# Altium PCB 175-00024_rev1, Backplane, Instrument Crate.PcbDoc (part 3 of 4)
Units mil, origin at the board's own origin, x right, y up, seen from the top; angles counter-clockwise.
Board outline 8400 x 10183.07 mil, 8 copper layers (Top Layer (*.GTL), Mid-Layer 1 (*.G1), +24V (*.GP1), RTN (*.GP2), +3.3V (*.GP3), +12V (*.GP4), Signal GND (*.GP5), Bottom Layer (*.GBL)); 192 components, 150 nets, 1439 pads, 415 vias.
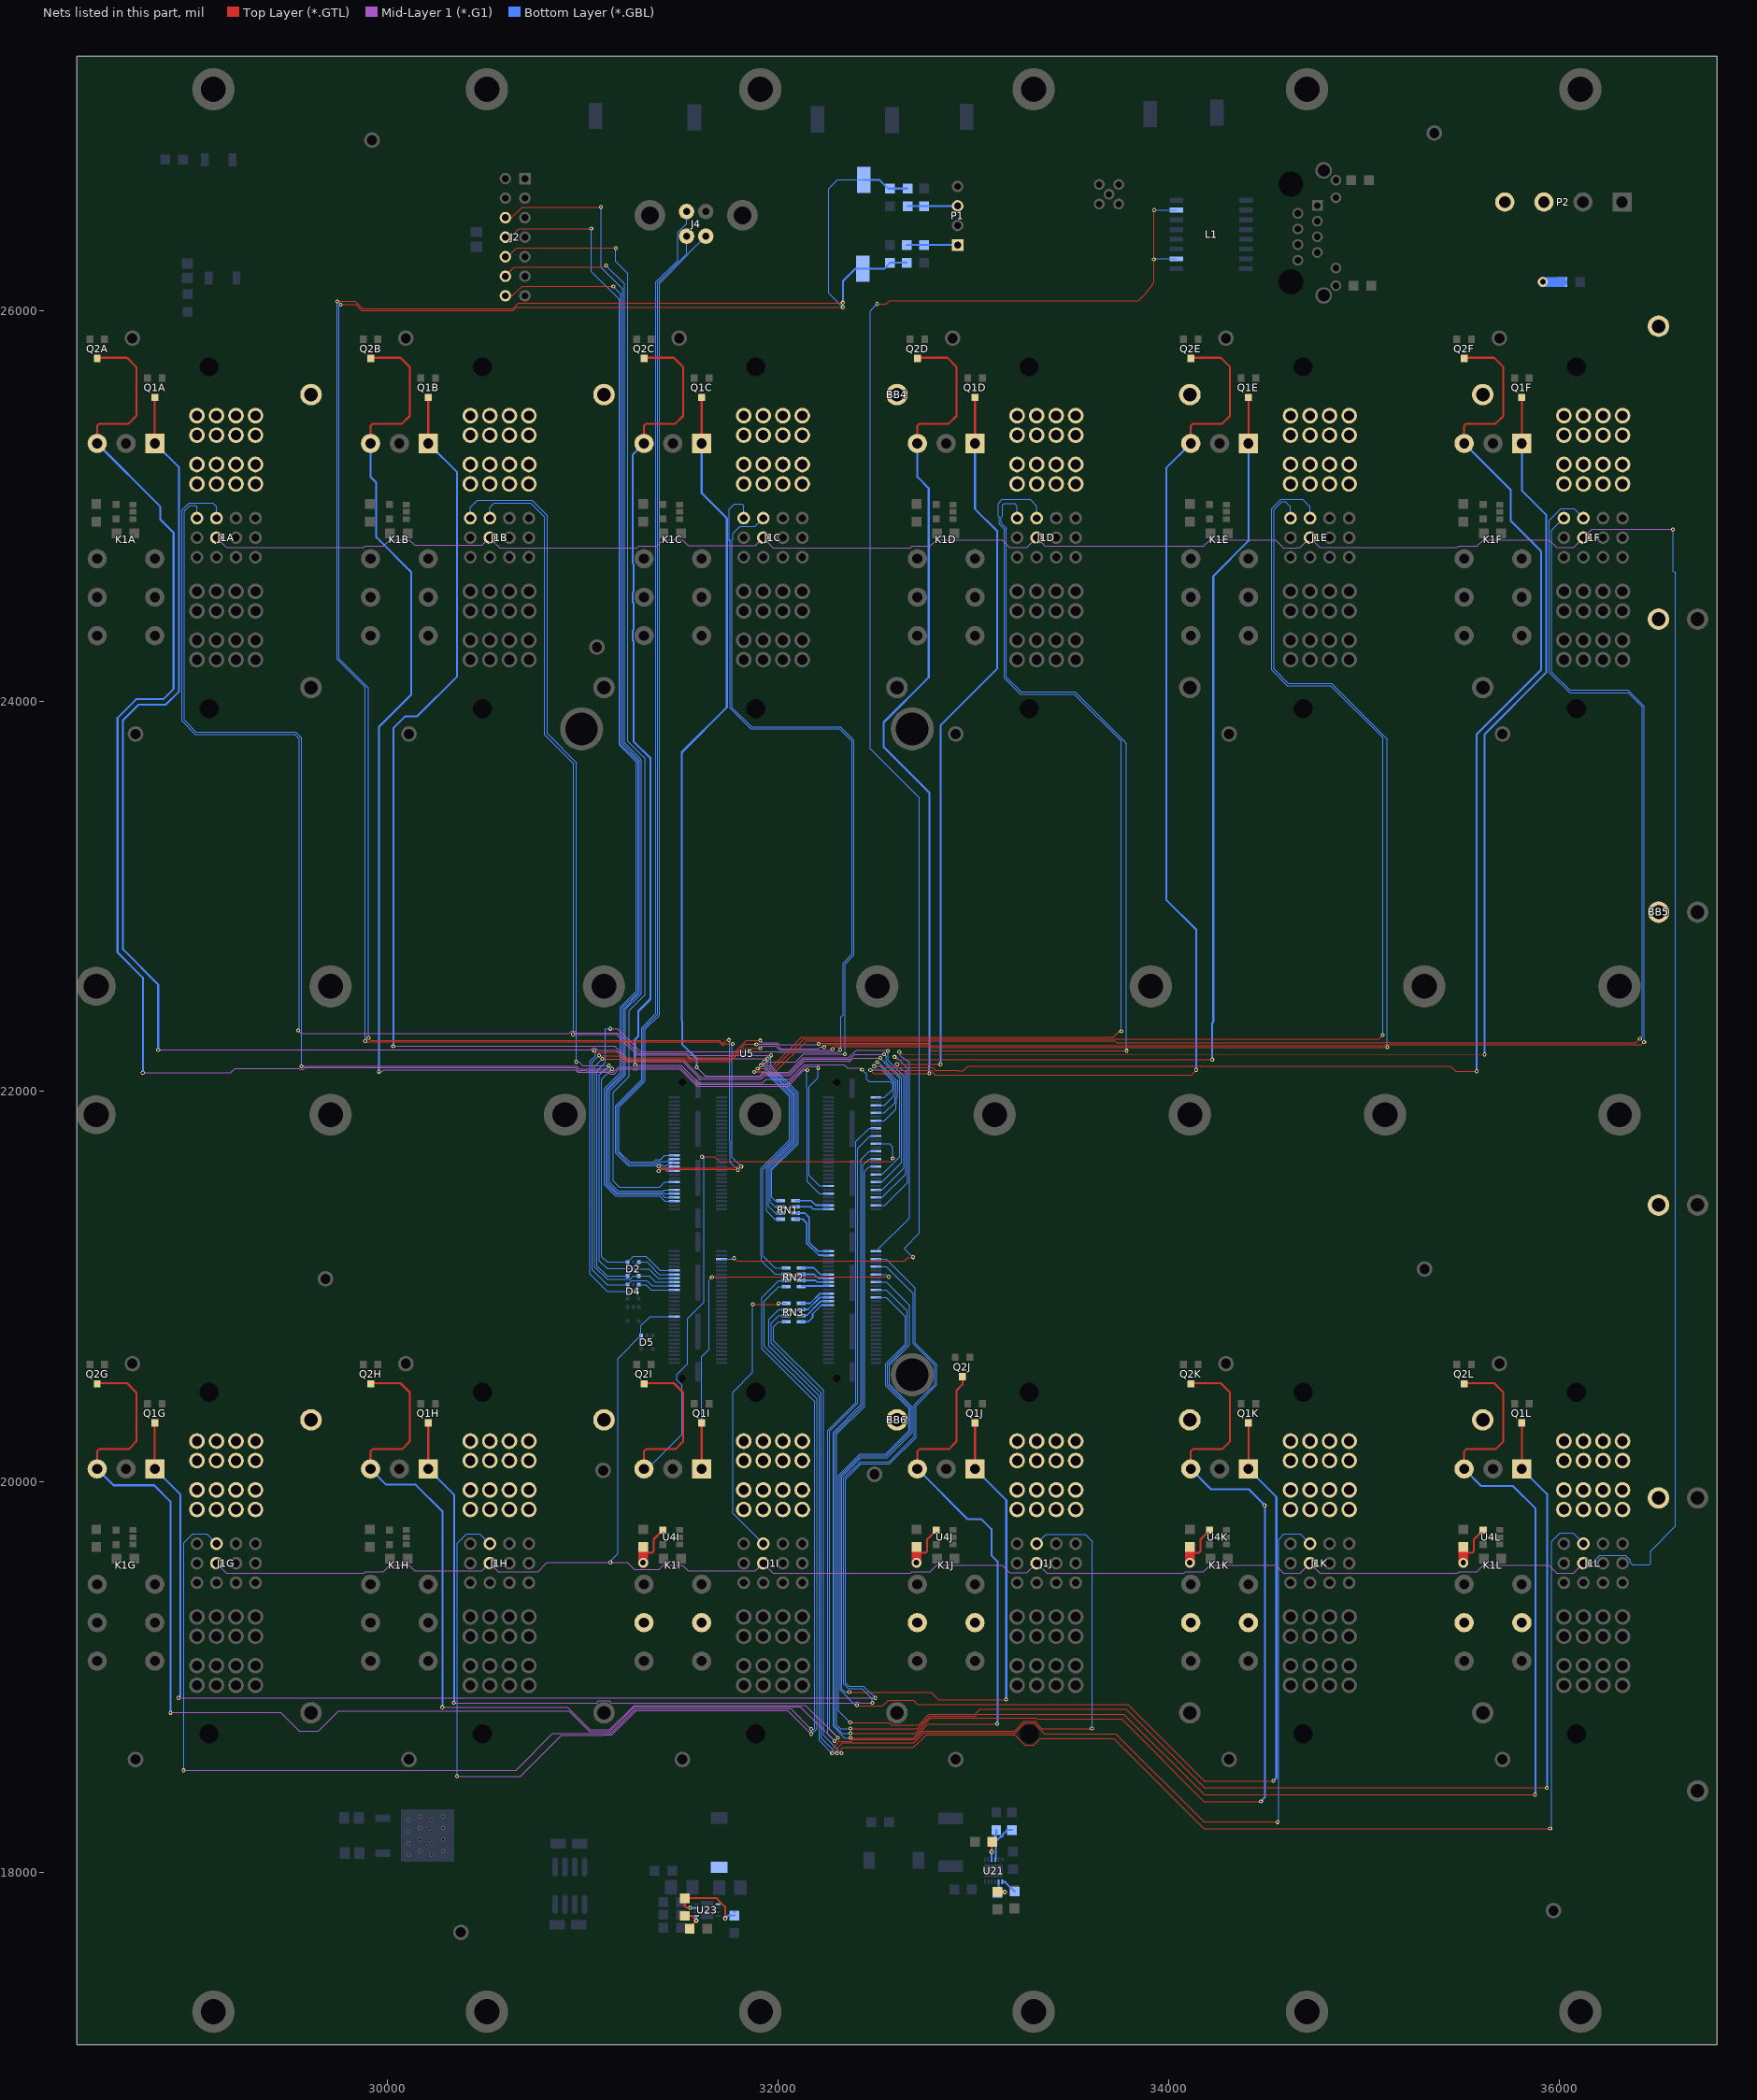
[diagram p9: the nets of this part, all layers, seen from the top]

## Via types
v1: diameter 20, hole 10, Top Layer (*.GTL) to Bottom Layer (*.GBL), 337 vias
v2: diameter 24, hole 10, Top Layer (*.GTL) to Bottom Layer (*.GBL), 48 vias
v3: diameter 50, hole 28, Top Layer (*.GTL) to Bottom Layer (*.GBL), 26 vias
v4: diameter 25.98, hole 12.99, Top Layer (*.GTL) to Bottom Layer (*.GBL), tented top, 4 vias

## Nets (pads, with @x,y where several pads share a name; then routed paths per layer and width w, separated by ;. In a path a pad name is that pad's centre, name@x,y a point inside that pad or via, vN(x,y) a via of type N, cw(c..) or ccw(c..) an arc to the next point about the centre after c; other vN are vias at no path point) (continued)
NetK1I_11: K1I.11 R4I.2 U4I.4 | length 235.6
  Top Layer (*.GTL) w10: 31309.99,19637.82 31354.99,19637.82 31364.99,19647.82 31364.99,19707.82 U4I.4@31411.99,19754.82
  Top Layer (*.GTL) w50: v3(31309.99,19587.82) 31309.99,19637.82
NetK1J_11: K1J.11 R4J.2 U4J.4 | length 265.6
  Top Layer (*.GTL) w10: 32709.99,19637.82 32754.99,19637.82 32764.99,19647.82 32764.99,19707.82 U4J.4@32811.99,19754.82
  Top Layer (*.GTL) w50: v3(32709.99,19587.82) 32709.99,19637.82 R4J.2@32709.99,19667.82
NetK1K_11: K1K.11 R4K.2 U4K.4 | length 265.6
  Top Layer (*.GTL) w10: 34109.99,19637.82 34154.99,19637.82 34164.99,19647.82 34164.99,19707.82 U4K.4@34211.99,19754.82
  Top Layer (*.GTL) w50: v3(34109.99,19587.82) 34109.99,19637.82 R4K.2@34109.99,19667.82
NetK1L_11: K1L.11 R4L.2 U4L.4 | length 265.6
  Top Layer (*.GTL) w10: 35509.99,19637.82 35554.99,19637.82 35564.99,19647.82 35564.99,19707.82 U4L.4@35611.99,19754.82
  Top Layer (*.GTL) w50: v3(35509.99,19587.82) 35509.99,19637.82 R4L.2@35509.99,19667.82
NetL3_1: L3.1 U23.1
NetP1_1: P1.1 R8.1 R9.2 | length 261.4
  Bottom Layer (*.GBL) w10: R9.2@32660,26334.08 32661,26335.08 P1.1@32921,26335.08
NetP1_3: P1.3 R10.1 R11.2 | length 256.4
  Bottom Layer (*.GBL) w10: R11.2@32665,26534.08 32666,26535.08 P1.3@32921,26535.08
NetR29_2: R29.2 R30.2 U21.9 | length 212.9
  Top Layer (*.GTL) w10: v2(33095.8,18107.34) 33095.8,18155.34 R29.2@33098.8,18158.34
  Bottom Layer (*.GBL) w10: U21.9@33095.65,18067.52 v2@33095.65,18107.19 ; v2(33095.8,18107.34) v2@33095.65,18107.19 ; R30.2@33118.8,18218.34 33118.8,18191.34 33095.65,18168.19 v2@33095.65,18107.19
NetR31_2: R31.2 U21.10 | length 204.2
  Bottom Layer (*.GBL) w10: U21.10@33113.37,18067.52 33116.8,18070.95 33116.8,18160.34 33140.8,18184.34 33147.53,18184.34 33152.8,18189.62 33152.8,18196.34 33174.8,18218.34 R31.2@33198.8,18218.34
NetR32_1: R32.1 R34.2 U21.2 | length 129.6
  Top Layer (*.GTL) w10: R34.2@33123.8,17903.34 33125.8,17901.34 v2(33162.8,17901.34)
  Bottom Layer (*.GBL) w10: U21.2@33131.08,17953.34 33131.08,17905.63 33126.8,17901.34 v2(33162.8,17901.34)
NetR33_2: R33.2 U21.1 | length 85.7
  Bottom Layer (*.GBL) w10: U21.1@33148.8,17953.34 33163.8,17953.34 R33.2@33213.8,17903.34
NetR35_1: R35.1 R37.2 U23.5 | length 148.2
  Top Layer (*.GTL) w10: R37.2@31523.98,17779 31559.98,17779 v2(31582.98,17756) 31548.98,17722 R35.1@31548.98,17714
  Bottom Layer (*.GBL) w10: v2(31582.98,17756) 31583.37,17756.39 U23.5@31583.37,17779.47
NetR37_1: R37.1 R40.2 U23.7 | length 440.7
  Top Layer (*.GTL) w10: v1(31551,17821) 31534,17821 31523.98,17831.02 R37.1@31523.98,17869 31686.98,17869 31729.98,17826 v2(31729.98,17766)
  Bottom Layer (*.GBL) w10: v1(31551,17821) 31553.16,17818.84 U23.7@31583.37,17818.84 ; v2(31729.98,17766) 31744.98,17781 R40.2@31777.98,17781 ; R40.2@31778.82,17799.15 R40.2@31778.98,17799
NetRN1_2: RN1.2 U5.B63 | length 306.1
  Bottom Layer (*.GBL) w8: RN1.2@32090.71,21346.6 32091.71,21347.6 32127,21347.6 32149,21325.6 32149,21222.49 32209.15,21162.35 U5.B63@32259.28,21162.35
NetRN1_4: RN1.4 U5.B61 | length 324.8
  Bottom Layer (*.GBL) w8: RN1.4@32090.71,21378.09 32138.5,21378.09 32161,21355.6 32161,21227.46 32206.43,21182.03 U5.B61@32259.28,21182.03
NetRN1_6: RN1.6 U5.B59 | length 173.1
  Bottom Layer (*.GBL) w8: RN1.6@32090.71,21409.59 32170.01,21409.59 32181.03,21398.57 U5.B59@32259.28,21398.57
NetRN1_8: RN1.8 U5.B57 | length 178
  Bottom Layer (*.GBL) w8: RN1.8@32090.71,21441.09 32171.51,21441.09 32194.35,21418.25 U5.B57@32259.28,21418.25
NetRN2_2: RN2.2 U5.B79 | length 139.9
  Bottom Layer (*.GBL) w8: RN2.2@32120.71,21001.6 32123.98,21004.87 U5.B79@32259.28,21004.87
NetRN2_4: RN2.4 U5.B77 | length 142.1
  Bottom Layer (*.GBL) w8: RN2.4@32120.71,21033.09 32192.5,21033.09 32201.05,21024.55 U5.B77@32259.28,21024.55
NetRN2_6: RN2.6 U5.B75 | length 147
  Bottom Layer (*.GBL) w8: RN2.6@32120.71,21064.59 32187.01,21064.59 32207.36,21044.24 U5.B75@32259.28,21044.24
NetRN2_8: RN2.8 U5.B73 | length 153.1
  Bottom Layer (*.GBL) w8: RN2.8@32120.71,21096.09 32122.22,21097.6 32185,21097.6 32218.68,21063.92 U5.B73@32259.28,21063.92
NetRN3_2: RN3.2 U5.B89 | length 184.3
  Bottom Layer (*.GBL) w8: RN3.2@32120.71,20821.6 32157,20821.6 32178,20842.6 32178,20860.6 32223.84,20906.44 U5.B89@32259.28,20906.44
NetRN3_4: RN3.4 U5.B87 | length 168.8
  Bottom Layer (*.GBL) w8: RN3.4@32120.71,20853.09 32147.5,20853.09 32220.53,20926.13 U5.B87@32259.28,20926.13
NetRN3_6: RN3.6 U5.B85 | length 163.9
  Bottom Layer (*.GBL) w8: RN3.6@32120.71,20884.59 32153.99,20884.59 32215.21,20945.81 U5.B85@32259.28,20945.81
NetRN3_8: RN3.8 U5.B83 | length 159
  Bottom Layer (*.GBL) w8: RN3.8@32120.71,20916.09 32166.69,20916.09 32216.1,20965.5 U5.B83@32259.28,20965.5
PWR_OFF1: K1A.1 Q1A.3 U5.B42 | length 8220.1
  Top Layer (*.GTL) w5: K1A.1@28810,25319 K1A.1@28827.92,25301.08
  Top Layer (*.GTL) w10: K1A.1@28810,25319 Q1A.3@28810,25557.74
  Mid-Layer 1 (*.G1) w5: v1@28827,22214.91 31043.5,22214.91 31053.17,22224.58 31066.83,22224.58 31076.5,22214.91 31076.5,22212.08 31172.46,22212.08 31230.46,22154.08 31511.46,22154.08 31602.46,22063.08 31913.54,22063.08 31932.54,22082.08 32063.21,22082.08 32137.21,22156.08 32354.54,22156.08 32356.08,22154.54 32368.92,22154.54 32386.46,22172.08 v1(32525,22172.08)
  Bottom Layer (*.GBL) w5: U5.B42@32502.59,21575.73 32534,21575.73 32625,21666.73 32625,22067.35 32546,22146.35 32546,22151.08 v1(32525,22172.08)
  Bottom Layer (*.GBL) w10: K1A.1@28810,25319 28934,25195 28934,24050.08 28865,23981.08 28726,23981.08 28647,23902.08 28647,22728.08 28827,22548.08 v1(28827,22213.08)
PWR_OFF2: K1B.1 Q1B.3 U5.B46 | length 6955.1
  Top Layer (*.GTL) w10: K1B.1@30210,25319 Q1B.3@30210,25557.74
  Mid-Layer 1 (*.G1) w5: v1@30031,22233.08 31048.94,22233.08 31049.44,22233.58 31070.56,22233.58 31071.06,22233.08 31164.18,22233.08 31234.18,22163.08 31515.18,22163.08 31606.18,22072.08 31909.82,22072.08 31928.82,22091.08 32059.48,22091.08 32133.48,22165.08 32358.27,22165.08 32359.81,22163.54 32365.19,22163.54 32392.73,22191.08 v1(32545,22191.08)
  Bottom Layer (*.GBL) w5: U5.B46@32502.59,21536.36 32534,21536.36 32635,21637.36 32635,22070.08 32561.58,22143.49 32555,22150.08 32555,22181.08 v1(32545,22191.08)
  Bottom Layer (*.GBL) w10: v1(30031,22232.08) 30031,23860.08 30093,23922.08 30154,23922.08 30358,24126.08 30358,25171 K1B.1@30210,25319
PWR_OFF3: K1C.1 Q1C.3 U5.B50 | length 5491.3
  Top Layer (*.GTL) w10: K1C.1@31610,25319 Q1C.3@31610,25557.74
  Mid-Layer 1 (*.G1) w5: v1(31585,22124.08) 31627,22082.08 ; 31627,22081.08 31906.09,22081.08 31925.09,22100.08 32055.75,22100.08 32129.75,22174.08 32362,22174.08 32362.5,22173.58 32401,22212.08 32560,22212.08 v1(32564,22208.08)
  Mid-Layer 1 (*.G1) w10: v1@31585,22122.17 v1(31585,22124.08)
  Bottom Layer (*.GBL) w5: U5.B50@32502.59,21496.99 32534,21496.99 32645,21607.99 32645,22076.99 32564,22157.99 v1(32564,22208.08)
  Bottom Layer (*.GBL) w10: v1(31585,22124.08) 31585,22168.08 31510,22243.08 31510,22362.08 31508,22364.08 31508,23737.08 31739,23968.08 31739,24936.08 31610,25065.08 K1C.1@31610,25319
PWR_OFF4: K1D.1 Q1D.3 U5.B54 | length 4596.5
  Top Layer (*.GTL) w5: v1@32610,22140.76 v1@32833,22140.76
  Top Layer (*.GTL) w10: K1D.1@33010,25319 Q1D.3@33010,25557.74
  Bottom Layer (*.GBL) w5: U5.B54@32502.59,21457.62 32534,21457.62 32655,21578.62 32655,22100.93 32614.14,22124.58 v1(32610,22140.08)
  Bottom Layer (*.GBL) w10: v1(32833,22140.08) 32833,23875.08 33124,24166.08 33124,24869.08 33010,24983.08 K1D.1@33010,25319
PWR_OFF5: K1E.1 Q1E.3 U5.B58 | length 5989.5
  Top Layer (*.GTL) w5: v1(32598,22178) 32611.27,22164.73 v1@34225,22164.73
  Top Layer (*.GTL) w10: K1E.1@34410,25319 Q1E.3@34410,25557.74
  Bottom Layer (*.GBL) w5: U5.B58@32502.59,21418.25 32549.17,21418.25 32665,21534.08 32665,22119 32611.21,22172.79 32603.21,22172.79 v1(32598,22178)
  Bottom Layer (*.GBL) w10: v1(34225,22164.08) 34225,22350.95 34230,22355.95 34230,24639.08 34410,24819.08 K1E.1@34410,25319
PWR_OFF6: K1F.1 Q1F.3 U5.B62 | length 7672.8
  Top Layer (*.GTL) w5: v1(32622,22204) 32637,22189 32638,22189 v1@35619,22188.7
  Top Layer (*.GTL) w10: K1F.1@35810,25319 Q1F.3@35810,25557.74
  Bottom Layer (*.GBL) w5: U5.B62@32502.59,21182.03 32674,21353.44 32674,22149.81 32625.37,22184.27 v1(32622,22204)
  Bottom Layer (*.GBL) w10: v1(35619,22190.08) 35619,23830.08 35936,24147.08 35936,24952.08 35810,25078.08 K1F.1@35810,25319
PWR_OFF7: K1G.1 Q1G.3 U5.B66 | length 7830.7
  Top Layer (*.GTL) w10: K1G.1@28809.99,20067.82 Q1G.3@28809.99,20306.56
  Mid-Layer 1 (*.G1) w5: v1(28931,18895.08) v1(32499,18895.08)
  Bottom Layer (*.GBL) w5: v1(32499,18895.08) 32439,18955.08 32364,18955.08 32347,18972.08 32347,20015.08 32426,20094.08 32572.71,20094.08 32707.5,20228.87 32707.5,20391.41 32814.15,20498.06 32814.15,20602.22 32704,20712.37 32704,20993.66 32555,21142.66 U5.B66@32502.59,21142.66
  Bottom Layer (*.GBL) w10: K1G.1@28809.99,20067.82 28940,19937.81 28940,18904.08 v1(28931,18895.08)
PWR_OFF8: K1H.1 Q1H.3 U5.B70 | length 6415.1
  Top Layer (*.GTL) w10: K1H.1@30209.99,20067.82 Q1H.3@30209.99,20306.56
  Mid-Layer 1 (*.G1) w5: v1(30341,18870.08) 31074.1,18870.08 31084.53,18880.5 31135.47,18880.5 31145.9,18870.08 32394.67,18870.08 32399.17,18874.58 32412.83,18874.58 32417.33,18870.08 v1(32484,18870.08)
  Bottom Layer (*.GBL) w5: v1(32484,18870.08) 32484,18885.24 32482.5,18886.74 32482.5,18889.58 32430,18942.08 32362,18942.08 32338,18966.08 32338,20018.81 32423.27,20104.08 32568.57,20104.08 32698.5,20234.01 32698.5,20395.14 32805.15,20501.79 32805.15,20598.5 32694,20709.65 32694,20964.29 32555,21103.29 U5.B70@32502.59,21103.29
  Bottom Layer (*.GBL) w10: K1H.1@30209.99,20067.82 30342,19935.81 30342,18871.08 v1(30341,18870.08)
PWR_OFF9: K1I.1 Q1I.3 U5.B74 | length 2218.9
  Top Layer (*.GTL) w5: v1(31663,21050.08) 32567,21050.08 v1(32568,21051.08)
  Top Layer (*.GTL) w10: K1I.1@31609.99,20067.82 Q1I.3@31609.99,20306.56
  Bottom Layer (*.GBL) w5: K1I.1@31609.99,20067.82 31609.99,20642.39 31647.5,20679.91 31647.5,21034.58 v1(31663,21050.08) ; U5.B74@32502.59,21063.92 32555,21063.92 ; 32555.16,21063.92 v1(32568,21051.08)
PWR_OFF10: K1J.1 Q1J.3 U5.B78 | length 4853.6
  Top Layer (*.GTL) w5: v1(32366,18925.08) 32784.09,18925.08 32822.36,18886.81 v1@33169,18886.81
  Top Layer (*.GTL) w10: K1J.1@33009.99,20067.82 Q1J.3@33009.99,20306.56
  Bottom Layer (*.GBL) w5: v1(32366,18925.08) 32364,18927.08 32342,18927.08 32329,18940.08 32329,20027.08 32426,20124.08 32560.28,20124.08 32689.5,20253.29 32689.5,20383.97 32571.68,20501.79 32571.68,20598.5 32674,20700.82 32674,20905.55 32555,21024.55 U5.B78@32502.59,21024.55
  Bottom Layer (*.GBL) w10: K1J.1@33009.99,20067.82 33170,19907.81 33170,18888.08 v1(33169,18887.08)
PWR_OFF11: K1K.1 Q1K.3 U5.B82 | length 6800.8
  Top Layer (*.GTL) w5: v1(32406,18858.08) 32410.5,18853.58 32536.5,18853.58 32566,18883.08 32695,18883.08 32716.27,18861.81 33792.54,18861.81 34184.26,18470.08 v1@34538,18470.08
  Top Layer (*.GTL) w10: K1K.1@34409.99,20067.82 Q1K.3@34409.99,20306.56
  Bottom Layer (*.GBL) w5: v1(32406,18858.08) 32398.27,18858.08 32320,18936.35 32320,20030.81 32423.27,20134.08 32556.14,20134.08 32680.5,20258.44 32680.5,20380.24 32562.68,20498.06 32562.68,20602.22 32664,20703.55 32664,20876.18 32555,20985.18 U5.B82@32502.59,20985.18
  Bottom Layer (*.GBL) w10: K1K.1@34409.99,20067.82 34553,19924.81 34553,18486.08 v1(34538,18471.08)
PWR_OFF12: K1L.1 Q1L.3 U5.B86 | length 8309.1
  Top Layer (*.GTL) w5: v1(32371,18769.08) 32572.95,18769.08 32584.53,18757.5 32722.78,18757.5 32775.92,18810.64 33009.38,18810.64 33035.54,18836.81 33782.18,18836.81 34183.91,18435.08 v1@35939,18435.08
  Top Layer (*.GTL) w10: K1L.1@35809.99,20067.82 Q1L.3@35809.99,20306.56
  Bottom Layer (*.GBL) w5: v1(32371,18769.08) 32311,18829.08 32311,20034.53 32420.54,20144.08 32552,20144.08 32671.5,20263.58 32671.5,20376.51 32553.68,20494.33 32553.68,20605.95 32654,20706.27 32654,20846.81 32555,20945.81 U5.B86@32502.59,20945.81
  Bottom Layer (*.GBL) w10: K1L.1@35809.99,20067.82 35939,19938.81 35939,18436.08 v1(35938,18435.08)
PWR_ON1: K1A.2 Q2A.3 U5.B47 | length 8690.5
  Top Layer (*.GTL) w10: K1A.2@28514.72,25319 28514.72,25409.37 28525.5,25420.14 28675.5,25420.14 28715.5,25460.14 28715.5,25710.14 28667.9,25757.74 Q2A.3@28515,25757.74
  Mid-Layer 1 (*.G1) w5: v1@28748,22096.6 29198.29,22096.6 29220.77,22119.08 29547.67,22119.08 29554.17,22112.58 29567.83,22112.58 29577.33,22122.08 30964.39,22122.08 30979.39,22107.08 30994.4,22107.08 30995.4,22108.08 31018.6,22108.08 31019.6,22107.08 31137.67,22107.08 31145.17,22099.58 31158.83,22099.58 31184.33,22125.08 31257.67,22125.08 31263.17,22119.58 31276.83,22119.58 31282.33,22125.08 31499.73,22125.08 31588.73,22036.08 32048,22036.08 32141,22129.08 32199,22129.08 v1(32207,22121.08)
  Bottom Layer (*.GBL) w5: v1(32207,22121.08) 32207,22070.08 32161,22024.08 32161,21569.68 32214,21516.68 U5.B47@32259.28,21516.68
  Bottom Layer (*.GBL) w10: K1A.2@28514.72,25319 28837,24996.72 28837,24931.08 28906,24862.08 28906,24061.68 28853.4,24009.08 28714.4,24009.08 28619,23913.68 28619,22713.08 28749,22583.08 28749,22098.08 v1(28748,22097.08)
PWR_ON2: K1B.2 Q2B.3 U5.B51 | length 7149.7
  Top Layer (*.GTL) w10: K1B.2@29914.72,25319 29914.72,25409.37 29925.5,25420.14 30075.5,25420.14 30115.5,25460.14 30115.5,25710.14 30067.9,25757.74 Q2B.3@29915,25757.74
  Mid-Layer 1 (*.G1) w5: v1(29958,22102.08) 29972.48,22102.08 29980.48,22110.08 30963.66,22110.08 30975.66,22098.08 30998.13,22098.08 30999.13,22099.08 31014.87,22099.08 31015.87,22098.08 31133.94,22098.08 31141.44,22090.58 31162.56,22090.58 31187.06,22115.08 31254.94,22115.08 31259.44,22110.58 31280.56,22110.58 31285.06,22115.08 31497,22115.08 31585,22027.08 32051.73,22027.08 32134.73,22110.08 v1(32151,22110.08)
  Bottom Layer (*.GBL) w5: v1(32151,22110.08) 32149,22108.08 32149,22021.08 32151,22019.08 32151,21540.31 32214,21477.31 U5.B51@32259.28,21477.31
  Bottom Layer (*.GBL) w10: K1B.2@29914.72,25319 29914.72,25147.36 29944,25118.08 29944,24839.08 30123,24660.08 30123,24032.08 29958,23867.08 v1(29958,22102.08)
PWR_ON3: K1C.2 Q2C.3 U5.B2 | length 5648.6
  Top Layer (*.GTL) w10: K1C.2@31314.72,25319 31314.72,25409.37 31325.5,25420.14 31475.5,25420.14 31515.5,25460.14 31515.5,25710.14 31467.9,25757.74 Q2C.3@31315,25757.74
  Mid-Layer 1 (*.G1) w5: v1(31270,22136.08) 31504,22136.08 31595,22045.08 31921,22045.08 31940,22064.08 32063.27,22064.08 32137.27,22138.08 32144.67,22138.08 32339.73,22138.08 32356.85,22120.96 32422.12,22120.96 v1(32431,22112.08)
  Bottom Layer (*.GBL) w5: v1(32431,22112.08) 32454,22089.08 32454,22064.34 32466.38,22051.96 32576.12,22051.96 32588,22040.08 32588,22011.43 32546,21969.43 U5.B2@32502.59,21969.43
  Bottom Layer (*.GBL) w10: v1@31268,22136.08 31268,22265.55 31286,22283.55 31286,22411.53 31348,22473.53 31348,23707.25 31261,23794.25 31261,24306.15 31256.51,24310.64 31256.51,24358.86 31261,24363.35 31261,24503 31256.51,24507.49 31256.51,24555.71 31261,24560.2 31261,24699.85 31256.51,24704.34 31256.51,25260.79 K1C.2@31314.72,25319
PWR_ON4: K1D.2 Q2D.3 U5.B6 | length 4862.2
  Top Layer (*.GTL) w5: v1(32474,22110.08) 32491,22093.08 v1(32777,22093.08)
  Top Layer (*.GTL) w10: K1D.2@32714.72,25319 32714.72,25409.37 32725.5,25420.14 32875.5,25420.14 32915.5,25460.14 32915.5,25710.14 32867.9,25757.74 Q2D.3@32715,25757.74
  Bottom Layer (*.GBL) w5: v1(32474,22110.08) 32530.73,22110.08 32597,22043.81 32597,22007.71 32594,22004.71 32594,21978.06 32546,21930.06 U5.B6@32502.59,21930.06
  Bottom Layer (*.GBL) w10: K1D.2@32714.72,25319 32714.72,25147.36 32772.94,25089.15 32772.94,24121.02 32542,23890.08 32542,23765.17 32776,23531.17 32776,22130.08 32775,22129.08 v1@32775,22095.08
PWR_ON5: K1E.2 Q2E.3 U5.B10 | length 6157.2
  Top Layer (*.GTL) w5: v1(32493,22130.08) 32514,22109.08 32769.67,22109.08 32770.17,22109.58 32783.83,22109.58 32807.51,22085.9 34117.82,22085.9 v1(34143,22111.08)
  Top Layer (*.GTL) w10: K1E.2@34114.72,25319 34114.72,25409.37 34125.5,25420.14 34275.5,25420.14 34315.5,25460.14 34315.5,25710.14 34267.9,25757.74 Q2E.3@34115,25757.74
  Bottom Layer (*.GBL) w5: v1(32493,22130.08) 32523.46,22130.08 32606,22047.53 32606,22003.98 32603,22000.98 32603,21974.33 32600,21971.33 32600,21944.69 32546,21890.69 U5.B10@32502.59,21890.69
  Bottom Layer (*.GBL) w10: K1E.2@34114.72,25319 33989,25193.28 33989,22983.08 34142,22830.08 v1@34142,22111.08
PWR_ON6: K1F.2 Q2F.3 U5.B14 | length 7825
  Top Layer (*.GTL) w5: v1(32509,22151.08) 32536,22124.08 32602.67,22124.08 32603.17,22123.58 32793.5,22123.58 32807.5,22109.58 32923.5,22109.58 32926.5,22106.58 32949.83,22106.58 32973.33,22130.08 35443.67,22130.08 35470.87,22102.87 v1@35578,22102.87
  Top Layer (*.GTL) w10: K1F.2@35514.72,25319 35514.72,25409.37 35525.5,25420.14 35675.5,25420.14 35715.5,25460.14 35715.5,25710.14 35667.9,25757.74 Q2F.3@35515,25757.74
  Bottom Layer (*.GBL) w5: U5.B14@32502.59,21851.32 32546,21851.32 32606,21911.32 32606,21937.96 32609,21940.96 32609,21967.61 32612,21970.61 32612,21997.25 32615,22000.25 32615,22051.26 32515.18,22151.08 v1(32509,22151.08)
  Bottom Layer (*.GBL) w10: K1F.2@35514.72,25319 35753,25080.72 35753,24923.08 35908.5,24767.58 35908.5,24158.84 35578,23828.34 v1(35578,22104.08)
PWR_ON7: K1G.2 Q2G.3 U5.B18 | length 9232.5
  Top Layer (*.GTL) w10: K1G.2@28514.71,20067.82 28514.71,20158.19 28525.49,20168.96 28675.49,20168.96 28715.49,20208.96 28715.49,20458.96 28667.89,20506.56 Q2G.3@28514.99,20506.56
  Mid-Layer 1 (*.G1) w5: v1@28891,18820.08 29454.27,18820.08 29549.27,18725.08 29648,18725.08 29750,18827.08 30931.27,18827.08 31035.27,18723.08 31142,18723.08 31268,18849.08 32116.06,18849.08 v1(32291.03,18674.11)
  Bottom Layer (*.GBL) w5: v1(32291.03,18674.11) 32257,18708.14 32257,20265.08 32400.03,20408.11 32400.03,21743.98 32468,21811.95 U5.B18@32502.59,21811.95
  Bottom Layer (*.GBL) w10: K1G.2@28514.71,20067.82 28598.45,19984.08 28807,19984.08 28890,19901.08 28890,18820.08 v1(28891,18819.08)
PWR_ON8: K1H.2 Q2H.3 U5.B22 | length 7656.4
  Top Layer (*.GTL) w10: K1H.2@29914.71,20067.82 29914.71,20158.19 29925.49,20168.96 30075.49,20168.96 30115.49,20208.96 30115.49,20458.96 30067.89,20506.56 Q2H.3@29914.99,20506.56
  Mid-Layer 1 (*.G1) w5: v1(30282,18847.08) 30924,18847.08 31039,18732.08 31138.27,18732.08 31264.27,18858.08 32141,18858.08 v1(32308,18691.08)
  Bottom Layer (*.GBL) w5: v1(32308,18691.08) 32266,18733.08 32266,20261.35 32409.03,20404.38 32409.03,21710.06 32468,21769.03 32468,21772.58 U5.B22@32502.59,21772.58
  Bottom Layer (*.GBL) w10: K1H.2@29914.71,20067.82 29995.45,19987.08 30146,19987.08 30283,19850.08 30283,18848.08 v1(30282,18847.08)
PWR_ON9: K1I.2 Q2I.3 U5.B26 | length 3692.4
  Top Layer (*.GTL) w5: v1(31612,21666.08) 31675,21666.08 31700,21641.08 32579,21641.08 32589,21651.08 v1(32589,21658.08)
  Top Layer (*.GTL) w10: K1I.2@31314.71,20067.82 31314.71,20158.19 31325.49,20168.96 31475.49,20168.96 31515.49,20208.96 31515.49,20458.96 31467.89,20506.56 Q2I.3@31314.99,20506.56
  Bottom Layer (*.GBL) w5: K1I.2@31314.71,20067.82 31332.02,20067.82 31508.5,20244.3 31508.5,20497.19 31483.88,20521.81 31483.88,20551.64 31538.28,20606.04 31538.28,20837.22 31622.5,20921.44 31622.5,21655.58 v1(31612,21666.08) ; U5.B26@32502.59,21733.21 32570.87,21733.21 32589,21715.08 v1(32589,21658.08)
PWR_ON10: K1J.2 Q2J.3 U5.B30 | length 6128.5
  Top Layer (*.GTL) w5: v1(32372,18690.08) 32695,18690.08 32767,18762.08 v1(33124,18762.08) v1@33125,18763.08
  Top Layer (*.GTL) w10: K1J.2@32714.71,20067.82 32714.71,20158.19 32725.49,20168.96 32875.49,20168.96 32915.49,20208.96 32915.49,20470.13 32945.5,20500.14 Q2J.3@32945.5,20543.88
  Bottom Layer (*.GBL) w5: v1(32372,18690.08) 32342.54,18690.08 32284,18748.62 32284,20253.9 32427.03,20396.93 32427.03,21652.87 32468,21693.84 U5.B30@32502.59,21693.84
  Bottom Layer (*.GBL) w10: K1J.2@32714.71,20067.82 32972.45,19810.08 33043,19810.08 33094,19759.08 33094,19625.08 33125,19594.08 33125,18763.08 v1(33124,18762.08)
PWR_ON11: K1K.2 Q2K.3 U5.B34 | length 8181
  Top Layer (*.GTL) w5: v1(32372,18714.08) 32704.82,18714.08 32783.38,18792.64 33322.67,18792.64 33328.51,18786.81 33761.47,18786.81 34183.2,18365.08 v1(34474,18365.08)
  Top Layer (*.GTL) w10: K1K.2@34114.71,20067.82 34114.71,20158.19 34125.49,20168.96 34275.49,20168.96 34315.49,20208.96 34315.49,20458.96 34267.89,20506.56 Q2K.3@34114.99,20506.56
  Bottom Layer (*.GBL) w5: v1(32372,18714.08) 32331.27,18714.08 32293,18752.35 32293,20250.17 32436.03,20393.2 32436.03,21622.5 32468,21654.47 U5.B34@32502.59,21654.47
  Bottom Layer (*.GBL) w10: K1K.2@34114.71,20067.82 34219.45,19963.08 34413,19963.08 v1@34494,19882.08 ; v1(34474,18365.08) 34494,18385.08 v1@34494,19882.08 ; v1(34493,19881.08) v1@34494,19882.08
PWR_ON12: K1L.2 Q2L.3 U5.B38 | length 9448.6
  Top Layer (*.GTL) w5: v1(32372,18738.08) 32716.09,18738.08 32779.65,18801.64 33013.11,18801.64 33023.27,18811.81 33771.83,18811.81 34183.55,18400.08 v1@35881,18400.08
  Top Layer (*.GTL) w10: K1L.2@35514.71,20067.82 35514.71,20158.19 35525.49,20168.96 35675.49,20168.96 35715.49,20208.96 35715.49,20458.96 35667.89,20506.56 Q2L.3@35514.99,20506.56
  Bottom Layer (*.GBL) w5: v1(32372,18738.08) 32320,18738.08 32302,18756.08 32302,20246.44 32445.03,20389.47 32445.03,21592.13 32468,21615.1 U5.B38@32502.59,21615.1
  Bottom Layer (*.GBL) w10: K1L.2@35514.71,20067.82 35602.45,19980.08 35765,19980.08 35881,19864.08 35881,18404.08 v1(35877,18400.08)
RTN: BB4.1 BB5.1 BB6.1 J1A.15 J1A.16 J1B.15 J1B.16 J1C.15 J1C.16 J1D.15 J1D.16 J1E.15 J1E.16 J1F.15 J1F.16 J1G.15 J1G.16 J1H.15 J1H.16 J1I.15 J1I.16 J1J.15 J1J.16 J1K.15 J1K.16 J1L.15 J1L.16 P2.3 P2.4 R1.1 | length 100
  Bottom Layer (*.GBL) w50: v3(35917.48,26146.08) R1.1@36017.48,26146.08
SILICON_SN: D5.1 J1A.6 J1B.6 J1C.6 J1D.6 J1E.6 J1F.6 J1G.6 J1H.6 J1I.6 J1J.6 J1K.6 J1L.6 U5.A95 | length 22422.4
  Mid-Layer 1 (*.G1) w5: J1G.6@29125.5,19585.14 29176.22,19534.42 29880.34,19534.42 29887.91,19541.98 29980.82,19541.98 30013.15,19574.32 30111.82,19574.32 30139.72,19546.42 30409.07,19546.42 30409.35,19546.14 30486.5,19546.14 J1H.6@30525.5,19585.14 30568.66,19541.98 30771.7,19541.98 30818.8,19589.08 v1(31143,19589.08) 31229,19589.08 31265,19553.08 31391.91,19553.08 31413.15,19574.32 31511.82,19574.32 31540.49,19545.65 31886.01,19545.65 J1I.6@31925.5,19585.14 31977.22,19533.42 32679.34,19533.42 32687.91,19541.98 32780.82,19541.98 32813.15,19574.32 33149.05,19574.32 33187.95,19535.42 33275.78,19535.42 J1J.6@33325.5,19585.14 33377.22,19533.42 34079.34,19533.42 34087.91,19541.98 34180.82,19541.98 34213.15,19574.32 34549.05,19574.32 34589.95,19533.42 34661.05,19533.42 34662.05,19534.42 34674.78,19534.42 J1K.6@34725.5,19585.14 34776.22,19534.42 35480.34,19534.42 35487.91,19541.98 35580.82,19541.98 35613.15,19574.32 35949.05,19574.32 35988.95,19534.42 36074.78,19534.42 J1L.6@36125.5,19585.14 ; J1A.6@29125.51,24836.32 29176.24,24785.6 29880.36,24785.6 29887.92,24793.16 29980.83,24793.16 30013.17,24825.5 30111.83,24825.5 30139.74,24797.6 30409.08,24797.6 30409.36,24797.32 30486.51,24797.32 J1B.6@30525.51,24836.32 30577.24,24784.6 31279.36,24784.6 31287.92,24793.16 31380.83,24793.16 31413.17,24825.5 31511.83,24825.5 31540.5,24796.83 31886.02,24796.83 J1C.6@31925.51,24836.32 31977.24,24784.6 32679.36,24784.6 32687.92,24793.16 32780.83,24793.16 32813.17,24825.5 33149.06,24825.5 33187.96,24786.6 33275.79,24786.6 J1D.6@33325.51,24836.32 33368.67,24793.16 34180.83,24793.16 34213.17,24825.5 34549.06,24825.5 34589.96,24784.6 34661.06,24784.6 34662.06,24785.6 34674.79,24785.6 J1E.6@34725.51,24836.32 34776.24,24785.6 35480.36,24785.6 35487.92,24793.16 35580.83,24793.16 35613.17,24825.5 35949.06,24825.5 35988.96,24785.6 36074.79,24785.6 J1F.6@36125.51,24836.32 36168.27,24879.08 v1(36583,24879.08)
  Bottom Layer (*.GBL) w5: v1(31143,19589.08) 31143,19596.08 31182,19635.08 31182,20633.6 D5.1@31300,20751.6 31300,20801.6 31345.79,20847.39 U5.A95@31469.12,20847.39 ; J1L.6@36125.5,19585.14 36170.35,19585.14 36209.35,19624.14 36341.65,19624.14 36364.5,19601.3 36364.5,19588.57 36376.93,19576.14 36463.73,19576.14 36469,19581.41 36469,19647.35 36597,19775.35 36597,24656.81 36591.73,24662.08 36588,24662.08 36584.5,24665.58 v1@36584.5,24880.08
TCK: J2.8 U5.A55 | length 5909.5
  Top Layer (*.GTL) w5: J2.8@30605,26375.08 30630,26375.08 30674,26419.08 v1(31045,26419.08)
  Bottom Layer (*.GBL) w5: v1(31045,26419.08) 31045,26199.08 31188,26056.08 31188,23774.08 31274.68,23687.4 31274.68,22513.4 31194,22432.72 31194,22096.72 31112,22014.72 31112,21522.44 31169.79,21464.65 31395.29,21464.65 31422,21437.94 U5.A55@31469.12,21437.94
TDI: J2.12 U5.A49 | length 5726.7
  Top Layer (*.GTL) w5: J2.12@30605,26175.08 30651,26221.08 31111,26221.08 v1(31120,26230.08)
  Bottom Layer (*.GBL) w5: v1(31120,26230.08) v1(31120,26230.08) 31215,26135.15 31215,23785.26 31293.77,23706.49 31296.41,23703.85 31299.04,23701.22 31301.68,23698.58 31301.68,22502.22 31299.04,22499.58 31296.41,22496.94 31293.77,22494.31 31221,22421.53 31221,22085.53 31139,22003.53 31139,21533.62 31180.97,21491.65 31416.66,21491.65 31422,21496.99 U5.A49@31469.12,21496.99
TDO: J2.14 U5.A53 | length 5665.3
  Top Layer (*.GTL) w5: J2.14@30605,26075.08 30642,26075.08 30690,26123.08 v1(31158,26123.08)
  Bottom Layer (*.GBL) w5: v1@31157.18,26122.26 31197,26082.43 31197,23777.81 31281.04,23693.76 31283.68,23691.13 31283.68,22509.67 31281.04,22507.03 31203,22428.99 31203,22092.99 31121,22010.99 31121,21526.17 31173.52,21473.65 31405.97,21473.65 31422,21457.62 U5.A53@31469.12,21457.62
TEMP_INLET: C3.2 R9.1 TP4.1 U5.A37 | length 9996.9
  Top Layer (*.GTL) w5: v1(29744.03,26047.05) 29834.76,26047.05 29872.36,26009.44 30642.36,26009.44 30671.97,26039.05 32331.97,26039.05 v1(32333,26040.08) ; v1(29887.03,22258.11) 29891.06,22254.08 31698.27,22254.08 31715.27,22237.08 31722.73,22237.08 31725.36,22239.71 31729.93,22244.28 v1(31769.3,22244.28) ; v1(31390,21617.26) 31397.5,21609.76 31774,21609.76 31779.82,21615.58 31812.5,21615.58 v1(31812.97,21616.05)
  Bottom Layer (*.GBL) w5: v1(29744.03,26047.05) 29744,24214.35 29887.03,24071.32 v1(29887.03,22258.11) ; v1(31390,21617.26) 31397.5,21609.76 31463.78,21609.76 U5.A37@31469.12,21615.1 ; v1(31769.3,22244.28) 31766,22240.98 31766,21663.02 v1(31812.97,21616.05)
  Bottom Layer (*.GBL) w10: v1(32333,26040.08) 32333,26149.08 32398,26214.08 TP4.1@32435,26214.08 32545,26214.08 C3.2@32575,26244.08 R9.1@32660,26244.08
TEMP_OUTLET: C4.2 R11.1 TP5.1 U5.A39 | length 10534.2
  Top Layer (*.GTL) w5: v1(29761,26030.08) 29839,26030.08 29868.64,26000.44 30646.09,26000.44 30661.73,26016.08 v1(32333,26016.08) ; v1(29904,22275.08) 29916,22263.08 31702,22263.08 31719,22246.08 31737,22264.08 v1(31749.5,22264.08) ; v1(31390,21593.26) 31397.5,21600.76 31794.32,21600.76 v1(31796,21599.08)
  Bottom Layer (*.GBL) w5: v1(29761,26030.08) 29753,26022.08 29753,24218.08 29904,24067.08 v1(29904,22275.08) ; v1(31390,21593.26) 31397.5,21600.76 31423.66,21600.76 31429,21595.42 U5.A39@31469.12,21595.42 ; v1(31749.5,22264.08) 31752.8,22260.78 31752.8,21744.28 31757,21740.08 31757,21638.08 v1(31796,21599.08) ; v1(32333,26016.08) 32261,26088.08 32261,26624.08 32306,26669.08 TP5.1@32440,26669.08
  Bottom Layer (*.GBL) w10: TP5.1@32440,26669.08 32520,26669.08 32565,26624.08 C4.2@32575,26624.08 R11.1@32665,26624.08
TMS: J2.6 U5.A51 | length 6020.7
  Top Layer (*.GTL) w5: J2.6@30605,26475.08 30636,26475.08 30690,26529.08 v1(31094,26529.08)
  Bottom Layer (*.GBL) w5: v1@31095,26529.08 31095,26219.79 31206,26108.79 31206,23781.53 31287.41,23700.13 31290.04,23697.49 31292.68,23694.85 31292.68,22505.94 31290.04,22503.31 31287.41,22500.67 31212,22425.26 31212,22089.26 31130,22007.26 31130,21529.89 31177.25,21482.65 31416.66,21482.65 31422,21477.31 U5.A51@31469.12,21477.31
TRST: J2.10 U5.A45 | length 5827.8
  Top Layer (*.GTL) w5: J2.10@30605,26275.08 30618,26275.08 30662,26319.08 v1(31171,26319.08)
  Bottom Layer (*.GBL) w5: v1@31170,26319.08 31170,26250.86 31233,26187.86 31233,23792.72 31306.5,23719.22 31309.14,23716.58 31311.77,23713.95 31314.41,23711.31 31317.04,23708.67 31319.68,23706.04 31319.68,22494.76 31317.04,22492.12 31314.41,22489.49 31311.77,22486.85 31309.14,22484.22 31306.5,22481.58 31239,22414.08 31239,22078.08 31157,21996.08 31157,21541.08 31188.43,21509.65 31395.29,21509.65 31422,21536.36 U5.A45@31469.12,21536.36
USB_D+: J4.3 U5.A35 | length 5314.5
  Bottom Layer (*.GBL) w5: U5.A35@31469.12,21634.79 31462.16,21634.79 31454.89,21627.51 31437.89,21627.51 31431.46,21621.08 31409.52,21621.08 31396.83,21633.76 31383.17,21633.76 31370.48,21621.08 31233.54,21621.08 31174.27,21680.35 31171.64,21682.99 31169,21685.62 31169,21927.53 31171.64,21930.17 31174.27,21932.81 31302.57,22061.11 31302.57,22326.15 31376,22399.58 31376,26145.53 31486.91,26256.44 31486.91,26399.39 31532.78,26445.26 J4.3@31532.78,26506.37
USB_D-: J4.2 U5.A33 | length 5163.5
  Bottom Layer (*.GBL) w5: 31434.08,21642.76 31379.44,21642.76 31366.76,21630.08 31237.27,21630.08 31180.64,21686.71 31178,21689.35 31178,21923.81 31180.64,21926.44 31311.57,22057.38 31311.57,22322.42 31385,22395.85 31385,26141.81 31532.78,26289.59 J4.2@31532.78,26380.39 ; 31434.08,21643.39 31437.89,21647.19 31461.84,21647.19 U5.A33@31469.12,21654.47
USB_VBUS: J4.1 U5.A31 | length 5190.3
  Bottom Layer (*.GBL) w5: U5.A31@31469.12,21674.16 31422,21674.16 31399.6,21651.76 31375.71,21651.76 31363.03,21639.08 31241,21639.08 31187,21693.08 31187,21920.08 31320.57,22053.65 31320.57,22318.69 31394,22392.12 31394,26138.08 31401,26145.08 31541.78,26285.86 31541.78,26290.96 J4.1@31631.2,26380.39
VA25: L1.10 L1.15 U5.A66 | length 8119.8
  Top Layer (*.GTL) w5: v1(31776,21146.98) 31791,21131.98 32648.56,21131.98 32665.37,21148.78 32688.7,21148.78 v1(32692,21152.08) ; v1(32508,26033.08) 32555,26033.08 32570.94,26049.02 33846.91,26049.02 33891,26093.11 33891,26096.84 33900,26105.84 33900,26109.56 33909,26118.56 33909,26122.29 33918,26131.29 33918,26135.02 33927,26144.02 v1(33927,26514.08)
  Bottom Layer (*.GBL) w5: U5.A66@31712.43,21142.66 31771.69,21142.66 v1(31776,21146.98) ; v1(32508,26033.08) 32473,25998.08 32473,23756.26 32726,23503.26 32726,21275.08 32651,21200.08 32651,21193.08 v1(32692,21152.08) ; v1(33926,26262.08) 33928,26264.08 L1.10@34042,26264.08 ; v1(33927,26514.08) L1.15@34042,26514.08
~CARD_PRESENT1: J1A.10 RN1.7 | length 6849.8
  Mid-Layer 1 (*.G1) w5: v1(29544,22313.08) 29558.91,22298.17 30933.76,22298.17 30945.17,22309.58 30958.83,22309.58 30967.33,22301.08 31181.91,22301.08 31195.94,22287.05 31199.46,22283.53 31286.91,22196.08 31537.46,22196.08 31547.85,22185.69 v1(31964.61,22185.69)
  Bottom Layer (*.GBL) w5: J1A.10@29125.51,24936.32 29125.51,24995.08 29106.51,25014.08 28985.03,25014.08 28948,24977.05 28948,23898.11 29016.03,23830.08 29525,23830.08 29549,23806.08 29549,22316.08 29546,22313.08 v1(29544,22313.08) ; v1(31964.61,22185.69) 31964.61,22132.65 32097,22000.26 32099.64,21997.63 32102.27,21994.99 32104.91,21992.35 32104.91,21732.99 32102.27,21730.35 32099.64,21727.72 32097,21725.08 31970,21598.08 31970,21457.09 31986,21441.09 RN1.7@32013.94,21441.09
~CARD_PRESENT2: J1B.10 RN1.5 | length 5047.3
  Mid-Layer 1 (*.G1) w5: v1@30953,22292.08 31173.94,22292.08 31190.97,22275.05 31278.94,22187.08 31533.73,22187.08 31552.09,22168.72 v1(31947.64,22168.72)
  Bottom Layer (*.GBL) w5: J1B.10@30525.51,24936.32 30525.51,24992.08 30547.51,25014.08 30734,25014.08 30805,24943.08 30805,23826.87 30954,23677.87 30954,22294.08 30953,22293.08 v1(30952,22293.08) ; v1(31947.64,22168.72) 31947.64,22136.9 32090.64,21993.9 32093.27,21991.26 32095.91,21988.63 32095.91,21736.72 32093.27,21734.08 32090.64,21731.44 31961,21601.81 31961,21434.59 31986,21409.59 RN1.5@32013.94,21409.59
~CARD_PRESENT3: J1C.10 RN1.3 | length 4767
  Mid-Layer 1 (*.G1) w5: v1(31930.67,22151.75) 32090.67,22151.75 32131,22192.08 v1(32344,22192.08)
  Bottom Layer (*.GBL) w5: J1C.10@31925.51,24936.32 31883.27,24894.08 31806,24894.08 31770,24858.08 31770,24827.08 31766.5,24823.58 31766.5,23966.58 31865,23868.08 32321.14,23868.08 32388.07,23801.15 32391,23798.22 32391,22699.94 32388.07,22697.01 32344,22652.94 v1(32344,22192.08) ; v1(31930.67,22151.75) 31930.67,22141.14 32084.27,21987.53 32086.91,21984.9 32086.91,21740.44 32084.27,21737.81 31952,21605.53 31952,21412.09 31986,21378.09 RN1.3@32013.94,21378.09
~CARD_PRESENT4: J1D.10 RN1.1 | length 6287.9
  Top Layer (*.GTL) w5: v1(31913.7,22134.78) 31978.7,22134.78 32122,22278.08 33718.39,22278.08 33747.39,22307.08 v1@33759,22307.08
  Bottom Layer (*.GBL) w5: v1(31913.7,22134.78) 31924.3,22134.78 32077.91,21981.17 32077.91,21744.17 31943,21609.26 31943,21389.6 31986,21346.6 RN1.1@32013.94,21346.6 ; J1D.10@33325.51,24936.32 33325.51,24998.08 33291.51,25032.08 33149.3,25032.08 33129,25011.78 33129,24946.08 33135,24940.08 33135,24905.94 33161,24879.94 33161,24116.94 33241.86,24036.08 33518,24036.08 33759,23795.08 v1(33759,22308.08)
~CARD_PRESENT5: J1E.10 RN2.7 | length 7882.4
  Top Layer (*.GTL) w5: v1(31896.73,22117.81) 31981.73,22117.81 32133,22269.08 35078,22269.08 v1(35098,22289.08)
  Bottom Layer (*.GBL) w5: v1(31896.73,22117.81) 31928.55,22117.81 32068.91,21977.44 32068.91,21747.9 31923,21601.99 31923,21159.09 31986,21096.09 RN2.7@32043.94,21096.09 ; J1E.10@34725.51,24936.32 34725.51,24995.08 34686.51,25034.08 34577.03,25034.08 34529,24986.05 34529,24159.11 34609.03,24079.08 34831,24079.08 35098,23812.08 v1(35098,22289.08)
~CARD_PRESENT6: J1F.10 RN2.5 | length 9159.5
  Top Layer (*.GTL) w5: v1(31879.76,22100.83) 31988.76,22100.83 32148,22260.08 33725.85,22260.08 33736.85,22249.08 35106.94,22249.08 35110.44,22252.58 35131.56,22252.58 35135.06,22249.08 36393,22249.08 v1(36415,22271.08)
  Bottom Layer (*.GBL) w5: v1(31879.76,22100.83) 31932.79,22100.83 32059.91,21973.72 32059.91,21751.63 31914,21605.72 31914,21155.36 31917,21152.36 31917,21133.59 31986,21064.59 RN2.5@32043.94,21064.59 ; J1F.10@36125.51,24936.32 36076.76,24985.08 36011,24985.08 35951,24925.08 35951,24145.08 36055,24041.08 36355.27,24041.08 36427,23969.35 36427,22283.08 v1(36415,22271.08)
~CARD_PRESENT7: J1G.10 RN2.3 | length 7261.1
  Mid-Layer 1 (*.G1) w5: v1(28958,18524.08) 30659,18524.08 30847.5,18712.58 30983.83,18712.58 30985.33,18714.08 31145.73,18714.08 31271.73,18840.08 32066,18840.08 v1(32171,18735.08)
  Bottom Layer (*.GBL) w5: v1(28958,18524.08) 28958.5,18524.58 28958.5,19688.58 29005,19735.08 29075.56,19735.08 J1G.10@29125.5,19685.14 ; RN2.3@32043.94,21033.09 32005,21033.09 31919,20947.09 31919,20682.26 32190,20411.26 32190,18963.08 32190,18738.08 32187,18735.08 v1(32171,18735.08)
~CARD_PRESENT8: J1H.10 RN2.1 | length 5893.3
  Mid-Layer 1 (*.G1) w5: v1(30357,18494.08) 30682.44,18494.08 30891.94,18703.58 31103.5,18703.58 31105,18705.08 31149.46,18705.08 31275.46,18831.08 32051,18831.08 v1(32171,18711.08)
  Bottom Layer (*.GBL) w5: v1(30357,18494.08) 30357.5,18494.58 30357.5,19687.58 30406,19736.08 30474.56,19736.08 J1H.10@30525.5,19685.14 ; RN2.1@32043.94,21001.6 32005,21001.6 31931,20927.6 31931,20695.71 32201,20425.71 32201,18963.08 32201,18736.35 32175.73,18711.08 v1(32171,18711.08)
~CARD_PRESENT9: J1I.10 RN3.7 | length 1504.4
  Top Layer (*.GTL) w5: v1(31872,20911.08) 32000,20911.08 v1(32004,20915.08)
  Bottom Layer (*.GBL) w5: v1(31872,20911.08) 31872,20562.08 31771,20461.08 31771,19839.64 J1I.10@31925.5,19685.14 ; v1@32005,20916.09 RN3.7@32043.94,20916.09
~CARD_PRESENT10: J1J.10 RN3.5 | length 5177.4
  Top Layer (*.GTL) w5: v1(32278,18611.08) 32278,18635.08 32316.5,18673.58 32378.83,18673.58 32386.33,18681.08 32698.73,18681.08 32742.73,18725.08 33212.22,18725.08 33261.78,18774.64 33315.22,18774.64 33353.05,18736.81 v1@33611,18736.81
  Bottom Layer (*.GBL) w5: RN3.5@32043.94,20884.59 32005,20884.59 31955,20834.59 31955,20697.17 32212,20440.17 32212,18677.08 v1(32278,18611.08) ; J1J.10@33325.5,19685.14 33373.44,19733.08 33574,19733.08 33611,19696.08 33611,18741.08 v1(33608,18738.08)
~CARD_PRESENT11: J1K.10 RN3.3 | length 6622.9
  Top Layer (*.GTL) w5: v1(32302,18611.08) 32302,18635.08 32331.5,18664.58 32382.56,18664.58 32384.06,18666.08 32696.46,18666.08 32746.46,18716.08 33215.95,18716.08 33265.51,18765.64 33311.49,18765.64 33365.32,18711.81 33730.4,18711.81 34182.13,18260.08 v1@34559,18260.08
  Bottom Layer (*.GBL) w5: RN3.3@32043.94,20853.09 32005,20853.09 31967,20815.09 31967,20710.62 32223,20454.62 32223,18690.08 v1(32302,18611.08) ; v1(34559,18259.08) 34565,18265.08 34565,19707.08 34592.56,19734.64 34676,19734.64 J1K.10@34725.5,19685.14
~CARD_PRESENT12: J1L.10 RN3.1 | length 7989.6
  Top Layer (*.GTL) w5: v1(32326,18611.08) 32326,18635.08 32333,18642.08 32695,18642.08 32760,18707.08 33213.07,18707.08 33265.51,18654.64 33311.49,18654.64 33343.65,18686.81 33720.05,18686.81 34181.78,18225.08 v1@35955,18225.08
  Bottom Layer (*.GBL) w5: RN3.1@32043.94,20821.6 32005,20821.6 31979,20795.6 31979,20724.08 32234,20469.08 32234,18703.08 v1(32326,18611.08) ; v1(35955,18226.08) 35963,18234.08 35963,19697.08 36005,19739.08 36071.56,19739.08 J1L.10@36125.5,19685.14
~CS_SLOT1: D2.1 J1A.9 U5.A71 | length 6537
  Mid-Layer 1 (*.G1) w5: v1(29561,22129.08) 29563,22131.08 30968.12,22131.08 30983.12,22116.08 30990.67,22116.08 30991.67,22117.08 31022.33,22117.08 31023.33,22116.08 v1(31152,22116.08)
  Bottom Layer (*.GBL) w5: J1A.9@29025.51,24936.32 29025.51,24995.08 29018.51,25002.08 28990,25002.08 28960,24972.08 28960,23903.08 29021,23842.08 29529.97,23842.08 29557.49,23814.56 29561,23811.05 v1(29561,22129.08) ; v1(31152,22116.08) 31099,22063.08 31099,21153.6 31126,21126.6 D2.1@31230,21126.6 31260,21156.6 31325,21156.6 31397.99,21083.61 U5.A71@31469.12,21083.61
~CS_SLOT2: D2.3 J1B.9 U5.A73 | length 4991.8
  Mid-Layer 1 (*.G1) w5: v1(30968,22152.08) 30969,22151.08 30982.06,22151.08 31000.09,22133.05 v1(31135.03,22133.05)
  Bottom Layer (*.GBL) w5: J1B.9@30425.51,24936.32 30425.51,24992.08 30462.51,25029.08 30740.21,25029.08 30820,24949.29 30820,23833.08 30969,23684.08 30969,22153.08 v1(30968,22152.08) ; v1(31135.03,22133.05) 31087,22085.02 31087,21132.1 31126,21093.1 31254.64,21093.1 31288.14,21126.6 D2.3@31289.06,21126.6 31330,21126.6 31392.68,21063.92 U5.A73@31469.12,21063.92
~CS_SLOT3: D2.5 J1C.9 U5.A75 | length 6418.8
  Mid-Layer 1 (*.G1) w5: v1(31141.88,22322.14) 31142.69,22322.95 31178.13,22322.95 31296,22205.08 32004.07,22205.08 32007.57,22201.58 32307.5,22201.58 v1(32320,22214.08)
  Bottom Layer (*.GBL) w5: v1(31141.88,22322.14) 31118.06,22322.14 31118.06,22150.02 31075,22106.96 31075,21106.73 31126,21055.73 D2.5@31230,21055.73 31265.87,21091.6 31340,21091.6 31387.36,21044.24 U5.A75@31469.12,21044.24 ; 31752,24821.08 31752,24827.08 ; J1C.9@31825.51,24936.32 31825.51,24998.57 31816,25008.08 31777,25008.08 31752,24983.08 31752,24827.08 ; v1(32320,22214.08) 32322,22216.08 32322,22382.08 32334,22394.08 32334,22657.08 32381,22704.08 32381,23794.08 32317,23858.08 31860.86,23858.08 31756.5,23962.44 31756.5,24822.58 31752,24827.08
~CS_SLOT4: D2.4 J1D.9 U5.A77 | length 7650.3
  Top Layer (*.GTL) w5: v1(31101.09,22166.99) 31153.91,22166.99 31154,22167.08 31194,22167.08 31206.27,22154.81 31759.18,22154.81 31826.46,22222.08 v1(31910,22222.08) ; v1(32280,22218.08) 32292.5,22230.58 32765.5,22230.58 32787,22209.08 v1(33786,22209.08)
  Mid-Layer 1 (*.G1) w5: v1(31910,22222.08) 31920.8,22232.88 31989,22232.88 32010.8,22211.08 32273,22211.08 v1(32280,22218.08)
  Bottom Layer (*.GBL) w5: v1(31101.09,22166.99) 31063,22128.9 31063,21101.76 31121.03,21043.73 31121.66,21043.73 31126,21039.39 31245.06,21039.39 31261.41,21055.73 D2.4@31289.06,21055.73 31340.87,21055.73 31372.05,21024.55 U5.A77@31469.12,21024.55 ; J1D.9@33225.51,24936.32 33225.51,24998.08 33212.51,25011.08 33158,25011.08 33150,25003.08 33150,24946.08 33145,24941.08 33145,24910.08 33171,24884.08 33171,24121.08 33246,24046.08 33522.14,24046.08 33766.07,23802.15 33786,23782.22 v1(33786,22209.08)
~CS_SLOT5: D4.1 J1E.9 U5.A79 | length 9009.9
  Top Layer (*.GTL) w5: v1(31084.12,22183.96) 31136.94,22183.96 31137.03,22184.05 31186.93,22184.05 31194.9,22176.08 31197.73,22176.08 31210,22163.81 31755.46,22163.81 31833.53,22241.88 v1(31890.2,22241.88) ; v1(32237,22228.08) 32248.5,22239.58 32769.23,22239.58 32781.73,22227.08 v1(35121,22227.08)
  Mid-Layer 1 (*.G1) w5: v1(31890.2,22241.88) 31992.73,22241.88 32014.53,22220.08 32209,22220.08 32217,22228.08 v1(32237,22228.08)
  Bottom Layer (*.GBL) w5: 31048,21423.08 31051,21426.08 ; v1(31084.12,22183.96) 31051,22150.84 31051,21426.08 ; U5.A79@31469.12,21004.87 31356.73,21004.87 31330,21031.6 31250,21031.6 D4.1@31230,21011.6 31126,21011.6 31051,21086.6 31051,21426.08 ; J1E.9@34604,24957.83 J1E.9@34625.51,24936.32 34625.51,24995.08 34598.51,25022.08 34582,25022.08 34541,24981.08 34541,24164.08 34614,24091.08 34835.97,24091.08 35106.49,23820.56 35121,23806.05 v1(35121,22227.08)
~CS_SLOT6: D4.3 J1F.9 U5.A81 | length 10182.9
  Top Layer (*.GTL) w5: v1(31060,22208.08) 31067.15,22200.93 31119.97,22200.93 31120.06,22201.02 31179.86,22201.02 31187.83,22193.05 31190.66,22193.05 31198.63,22185.08 31201.46,22185.08 31213.73,22172.81 31751.73,22172.81 31840.6,22261.68 v1(31910,22261.68) ; v1(32209.17,22243.58) 32214.17,22248.58 32772.96,22248.58 32785.46,22236.08 35106.67,22236.08 35114.17,22243.58 35127.83,22243.58 35131.33,22240.08 36423.02,22240.08 v1(36436,22253.08)
  Mid-Layer 1 (*.G1) w5: v1(31910,22261.68) 31920.8,22250.88 31996.46,22250.88 32006.25,22241.08 32206.33,22241.08 32209.17,22243.91 v1(32209.17,22243.58)
  Bottom Layer (*.GBL) w5: v1(31060,22208.08) 31067.15,22200.93 31067.15,22183.96 31039,22155.81 31039,21065.1 31126,20978.1 31252.94,20978.1 31286.44,21011.6 D4.3@31289.06,21011.6 31325,21011.6 31351.42,20985.18 U5.A81@31469.12,20985.18 ; J1F.9@36025.51,24936.32 35963,24873.81 35963,24148.08 36055,24056.08 36353,24056.08 36436,23973.08 v1(36436,22253.08)